# Altium PCB Main.PcbDoc (part 1 of 2)
Units mil, origin at the board's own origin, x right, y up, seen from the top; angles counter-clockwise.
Board outline 5000 x 2500 mil, 2 copper layers (Top Layer, Bottom Layer), stack 62.8 mil thick; 113 components, 93 nets, 434 pads, 302 vias.
Unrouted connection lines stored in the file: 1.
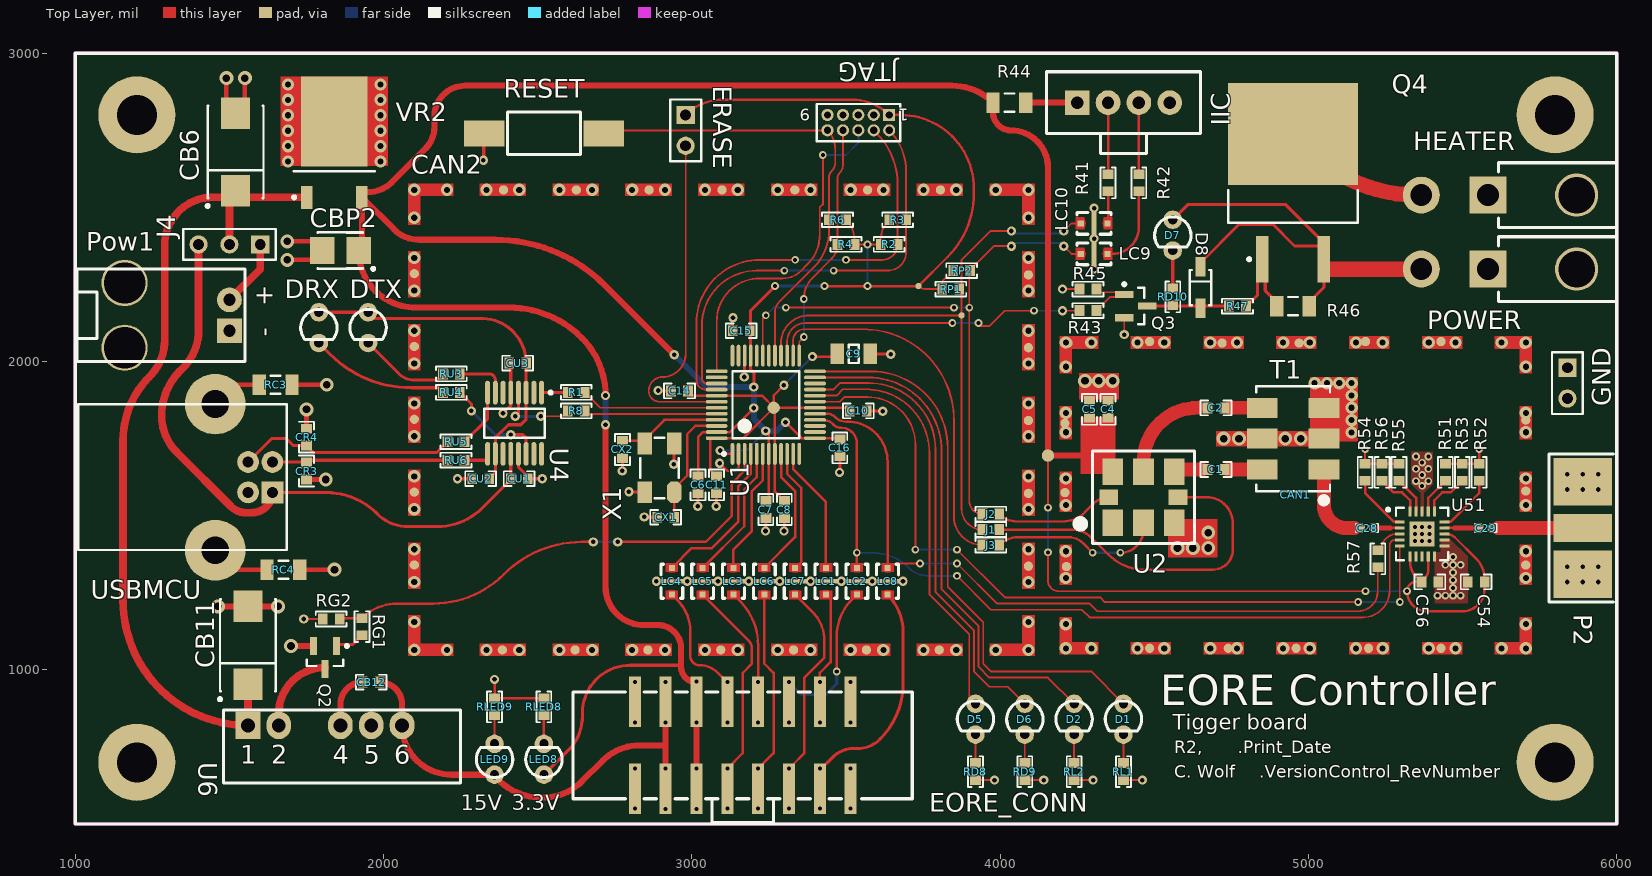
[diagram p0: Top Layer view]
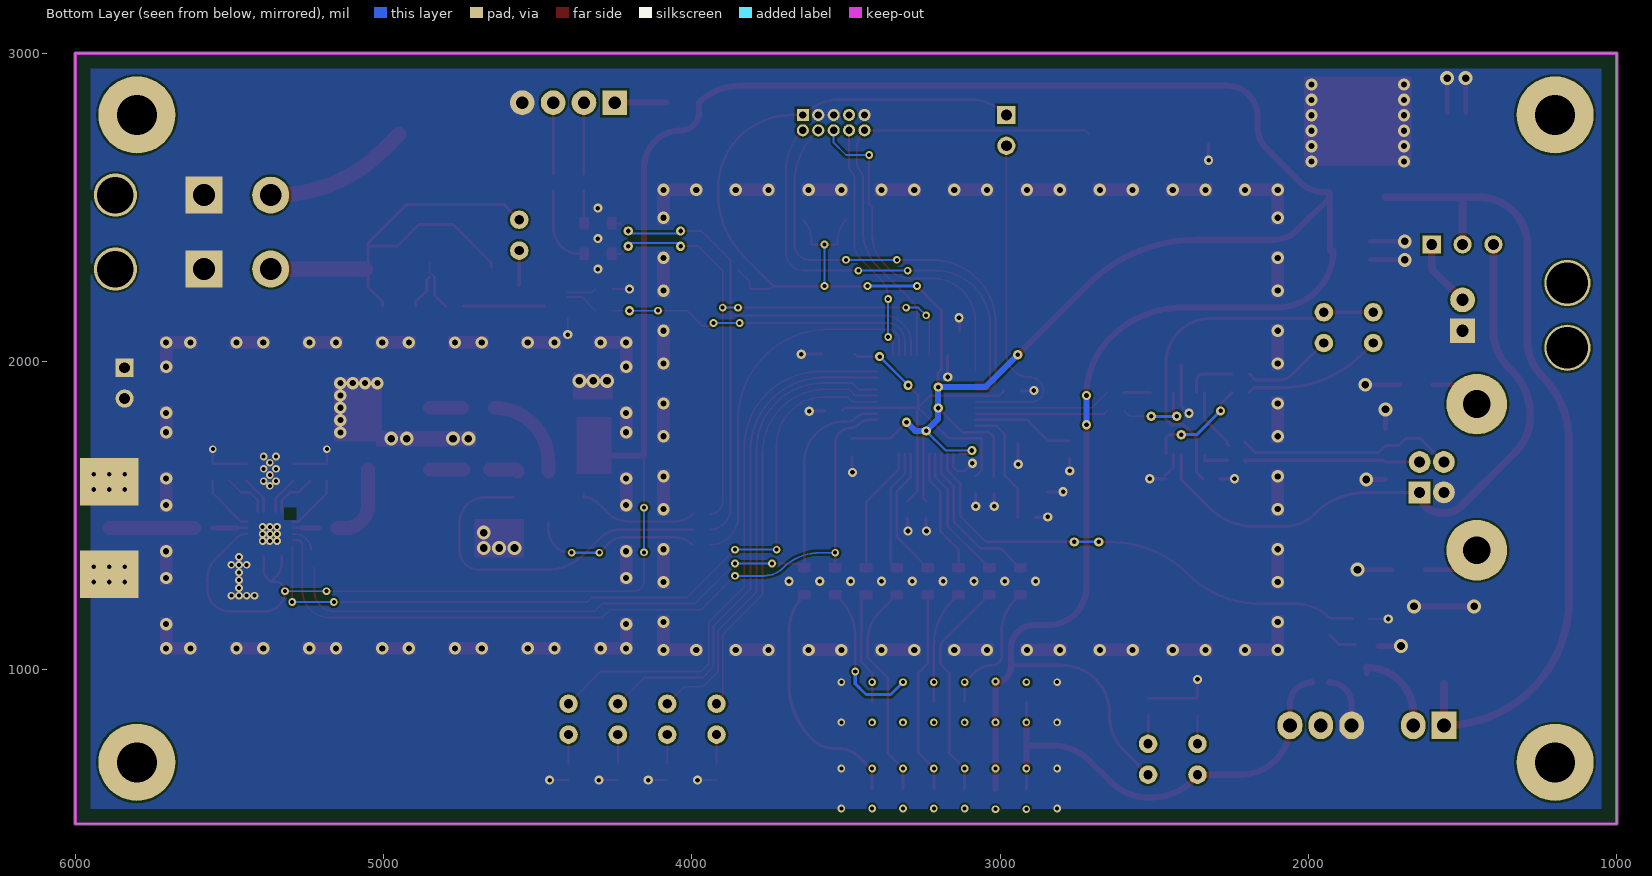
[diagram p1: Bottom Layer view, seen from below]

## Layer stack, top to bottom
Top Layer: signal copper 1.4
Dielectric: core 60, FR-4, Dk 4.8
Bottom Layer: signal copper 1.4

## Board outline
1000,500 6000,500 6000,3000 1000,3000

## Design rules (kind name [scope] priority, off if disabled: settings)
Clearance [All] p1: gap=7
DiffPairsRouting [All] p1: maxlimit=10 minlimit=10 mostfreqgap=10 maxuncoupledlength=500
FlightTimeFalling [All] p1: maximum=1.000n
FlightTimeRising [All] p1: maximum=1.000n
HoleSize [All] p1: absolutevalues=TRUE maxlimit=500 minlimit=1 maxpercent=80.000 minpercent=20.000
HoleSize Testpoint [All] p2: absolutevalues=TRUE maxlimit=100 minlimit=1 maxpercent=80.000 minpercent=20.000
HoleSize TestPointUsage [All] p3: absolutevalues=TRUE maxlimit=100 minlimit=1 maxpercent=80.000 minpercent=20.000
MinimumAnnularRing [All] p1: minimumring=5
MinimumSolderMaskSliver [All] p1 off: minsoldermaskwidth=10
MinimumSolderMaskSliver SilkscreenOverComponentPads [All] p2: minsoldermaskwidth=10
OvershootFalling [All] p1: maximum=330.0m
OvershootRising [All] p1: maximum=330.0m
ParallelSegment [All] p1 off: limit=10000 gap=10
PolygonConnect Heatsink [InNet('GND') vs InNet('GND')] p1: connectstyle=Direct reliefconductorwidth=10 reliefentries=4 polygonreliefangle="90 Angle" airgapwidth=10
PolygonConnect [All] p2: connectstyle=Relief reliefconductorwidth=10 reliefentries=4 polygonreliefangle="90 Angle" airgapwidth=10
RoomDefinition TEMP [InComponentClass('TEMP')] p1 off: confinementstyle=ConfineIn formatcopy=TRUE lockcomponents=FALSE outline 8025,2555 9495,2555 9495,3175 8025,3175
RoomDefinition NDPS [InComponentClass('NDPS')] p2 off: confinementstyle=ConfineIn formatcopy=TRUE lockcomponents=FALSE outline 6305,3125 6825,3125 6825,3580 6305,3580
RoomDefinition ATTEN3 [InComponentClass('ATTEN3')] p3 off: confinementstyle=ConfineIn formatcopy=TRUE lockcomponents=FALSE outline 6340,3745 7320,3745 7320,4075 6340,4075
RoomDefinition USB [InComponentClass('USB')] p4 off: confinementstyle=ConfineIn formatcopy=TRUE lockcomponents=FALSE outline 7580,2235 9580,2235 9580,3235 7580,3235
RoomDefinition Main [InComponentClass('Main')] p5 off: confinementstyle=ConfineIn formatcopy=TRUE lockcomponents=FALSE outline 7495,2125 9495,2125 9495,3125 7495,3125
RoutingVias [All] p1: holewidth=15 width=30 viastyle="Through Hole" minholewidth=10 minwidth=25 maxholewidth=250 maxwidth=500
SignalStimulus [All] p1: kind=2 level=0 starttime=10.00n stoptime=60.00n periodtime=100.00n
SilkToSilkClearance [All] p1 off: silktosilkclearance=10
SolderMaskExpansion [All] p1: expansion=4
SupplyNets [All] p1: voltage=3.300
UndershootFalling [All] p1: maximum=330.0m
UndershootRising [All] p1: maximum=330.0m
Width Width_General [All] p1: maxlimit=250 minlimit=6 preferedwidth=10
Width "Width Differential Pair" [(InDifferentialPairClass('All Differential Pairs'))] p2: maxlimit=31.8 minlimit=1.94 preferedwidth=22.52 toplayer_minwidth=15.8 bottomlayer_maxwidth=5.3 bottomlayer_prefwidth=3.35 impedancedriven=TRUE minimp=80.000000 maximp=100.000000 favimp=90.000000
24 further rules are at their usual default settings.

## Classes and differential pairs
component class TEMP: D7 D8 HEATER IIC LC9 LC10 POWER Q3 Q4 R41 R42 R43 R44 R45 R46 R47 RD10
component class Main: C1 C2 C4 C5 C28 C29 CAN1 CAN2 CB6 CBP2 EORE_CONN GND J1 J2 J3 LC1 LC2 LC3 LC4 LC5 LC6 LC7 LC8 LED8 P2 RLED8 RP1 RP2 T1 U2 VR2
component class USB: C6 C7 C8 C9 C10 C11 C14 C15 C16 CR3 CR4 CU1 CU2 CU3 CX1 CX2 D1 D2 D5 D6 DRX DTX ERASE J4 JTAG Pow1 R1 R2 R3 R4 R6 R8 RC3 RC4 RD8 RD9 RESET RL1 RL2 RU3 RU4 RU5 RU6 U1 U4 USBMCU X1
component class ATTEN3: C54 C56 R51 R52 R53 R54 R55 R56 R57 U51
component class NDPS: CB11 CB12 LED9 Q2 RG1 RG2 RLED9 U6
differential pair USB: +USB_P -USB_N

## Components (designator, comment, footprint, x,y, rotation, side; value= is the part's Value field where it differs from the comment)
C1 "SMT Cap" 0603C 4700,1650 r0 top
C2 "SMT Cap" 0603C 4700,1850 r0 top
C4 "SMT Cap" 0603C 4350,1845 r270 top
C5 "SMT Cap" 0603C 4290,1845 r270 top
C6 "Cap Semi" 0603C 3020,1600 r90 top
C7 "Cap Semi" 0603C 3240,1520 r90 top
C8 "Cap Semi" 0603C 3300,1520 r90 top
C9 "Cap Semi" 1206C 3525,2025 r180 top
C10 "Cap Semi" 0603C 3540,1840 r180 top
C11 "Cap Semi" 0603C 3080,1600 r90 top
C14 "Cap Semi" 0603C 2960,1905 r0 top
C15 "Cap Semi" 0603C 3160,2100 r0 top
C16 "Cap Semi" 0603C 3480,1720 r90 top
C28 "Cap" 0402C 5190,1460 r0 top
C29 "Cap" 0402C 5575,1460 r0 top
C54 "SMT Cap" 0603C 5544.02,1285.44 r0 top
C56 "SMT Cap" 0603C 5394.02,1285.44 r180 top
CAN1 "EMI Shield" BMI-S-205-F 5725,1050 r90 top
CAN2 "EMI Shield" BMI-S-230-F 2080,1045 r0 top locked
CB6 "Cap Pol3" V 1520,2680 r90 top
CB11 "Cap Pol3" V 1560,1080 r90 top
CB12 "Cap Semi" 0603C 1960,960 r0 top
CBP2 "100 uF" B 1860,2360 r180 top
CR3 "PGB1010603" 0603PG 1750,1645 r270 top
CR4 "PGB1010603" 0603PG 1750,1755 r90 top
CU1 "Cap Semi" 0603C 2440,1620 r180 top
CU2 "Cap Semi" 0603C 2315,1620 r0 top
CU3 "Cap Semi" 0603C 2435,1995 r0 top
CX1 "Cap Semi" 0603C 2915,1495 r0 top
CX2 "Cap Semi" 0603C 2775,1715 r90 top
D1 "LED0" "T1 LED" 4400,790 r0 top
D2 "LED0" "T1 LED" 4240,790 r0 top
D5 "LED0" "T1 LED" 3920,790 r0 top
D6 "LED0" "T1 LED" 4080,790 r0 top
D7 "LED0" "T1 LED" 4560,2360 r0 top
D8 "D Zener" SOD123/X.85 4650,2240 r270 top
DRX "LED0" "T1 LED" 1790,2060 r0 top
DTX "LED0" "T1 LED" 1950,2060 r0 top
EORE_CONN "Header 8X2" "SMT 16-pin rectangular header" 3165,755 r0 top
ERASE "Header 2" HDR1X2 2980,2800 r270 top
GND "Jumper" HDR1X2 5840,1980 r270 top
HEATER "Header 2" "Molex Mini-Fit Jr 5569 - 2 Pin, RA" 5870,2540 r90 top
IIC "Header 4" "AMPModu MTE 4 Pin Shrouded Header" 4550,2840 r180 top
J1 "Jumper" 0603R 3970,1455 r180 top
J2 "Jumper" 0603R 3970,1505 r180 top
J3 "Jumper" 0603R 3970,1405 r180 top
J4 "Jumper" HDR1X3 1600,2380 r180 top
JTAG "JTAG" MHDR2X5 3640,2800 r180 top
LC1 "MEM2012F" "MEM2012S LC Filter" 3435,1287.44 r90 top
LC2 "MEM2012F" "MEM2012S LC Filter" 3535,1287.44 r90 top
LC3 "MEM2012F" "MEM2012S LC Filter" 3135,1287.44 r270 top
LC4 "MEM2012F" "MEM2012S LC Filter" 2935,1287.44 r270 top
LC5 "MEM2012F" "MEM2012S LC Filter" 3035,1287.44 r90 top
LC6 "MEM2012F" "MEM2012S LC Filter" 3235,1287.44 r90 top
LC7 "MEM2012F" "MEM2012S LC Filter" 3335,1287.44 r270 top
LC8 "MEM2012F" "MEM2012S LC Filter" 3635,1287.44 r270 top
LC9 "MEM2012F" "MEM2012S LC Filter" 4304.76,2349.39 r0 top
LC10 "MEM2012F" "MEM2012S LC Filter" 4304.76,2448.39 r180 top
LED8 "LED0" "T1 LED" 2520,760 r180 top
LED9 "LED0" "T1 LED" 2360,760 r180 top
P2 "COAX-M" "SMA Jack - PCB Edge - MultiSize" 5990,1460 r180 top
Pow1 "Header 2" "AMPModu MTE 2 Pin Right Angle PCB-Locking Shrouded Header" 1500,2100 r90 top
POWER "Header 2" "Molex Mini-Fit Jr 5569 - 2 Pin, RA" 5870,2300 r90 top
Q2 "MOSFET-N" SOT23-3N 1810,1040 r270 top
Q3 "MOSFET-N" SOT23-3N 4440,2180 r0 top
Q4 "IRF4905STRLPBFCT-ND" TO254P1520-3_4N 4950,2580 r90 top
R1 "Res Semi" 0603R 2625,1900 r0 top
R2 "Res Semi" 0603R 3640,2380 r180 top
R3 "Res Semi" 0603R 3667.56,2460 r180 top
R4 "Res Semi" 0603R 3500,2380 r0 top
R6 "Res Semi" 0603R 3472.44,2460 r0 top
R8 "Res Semi" 0603R 2625,1840 r0 top
R41 "Res Semi" 0603R 4350,2580 r90 top
R42 "Res Semi" 0603R 4450,2580 r90 top
R43 "Res Semi" 0603R 4285,2165 r0 top
R44 "Res Semi" 1206R 4030,2840 r180 top
R45 "Res Semi" 0603R 4285,2235 r0 top
R46 "Res Semi" 1206R 4950,2180 r0 top
R47 "Res Semi Small" 0603R 4770,2180 r180 top
R51 "RES Semi" 0603R 5444,1640.77 r90 top
R52 "RES Semi" 0603R 5554,1640.77 r90 top
R53 "RES Semi" 0603R 5499,1640.77 r90 top
R54 "RES Semi" 0603R 5184,1640.77 r90 top
R55 "RES Semi" 0603R 5294,1640.77 r90 top
R56 "RES Semi" 0603R 5239,1640.77 r90 top
R57 "RES Semi" 0603R 5225,1360 r270 top
RC3 "Res Semi" 1206R 1650,1925 r180 top
RC4 "Res Semi" 1206R 1675,1325 r180 top
RD8 "Res Semi Small" 0603R 3920,670 r270 top
RD9 "Res Semi Small" 0603R 4080,670 r270 top
RD10 "Res Semi Small" 0603R 4560,2210 r270 top
RESET "SW-PB" TL3302BF180QG/TR 2520,2740 r180 top
RG1 "Res Semi Small" 0603R 1930,1140 r270 top
RG2 "Res Semi Small" 0603R 1830,1165 r0 top
RL1 "Res Semi Small" 0603R 4400,670 r270 top
RL2 "Res Semi Small" 0603R 4240,670 r270 top
RLED8 "Res Semi Small" 0603R 2520,880 r90 top
RLED9 "Res Semi Small" 0603R 2360,880 r90 top
RP1 "Res Semi" 0603R 3840,2235 r180 top
RP2 "Res Semi" 0603R 3875,2295 r180 top
RU3 "Res Semi Small" 0603R 2220,1960 r0 top
RU4 "Res Semi Small" 0603R 2220,1900 r0 top
RU5 "Res Semi Small" 0603R 2235,1740 r0 top
RU6 "Res Semi Small" 0603R 2235,1680 r0 top
T1 "ADT4-1WT" CD542 4950,1750 r90 top
U1 "ATSAM4N8A" TSQFP50P900X900-48N 3240,1860 r90 top
U2 "SI57x" SI57x 4465,1560 r0 top
U4 "FT230X" SOP635P600-16AN 2425,1800 r270 top
U6 "NMF DC-DC" SIL-6(A1) 1560,820 r0 top
U51 "DAT-31R5-SP" QFN50P400X400X90_HS-21N 5369,1440.77 r0 top
USBMCU "USB B Connector" "USB Connector (type B)" 1600,1625 r270 top
VR2 "LF33CDT" TO228P1000-3_4N 1840,2710 r90 top
X1 "CTX819CT-ND" "Abracon ABM3B Crystal" 2895,1655 r90 top

## Footprints (in the part's own frame and the unit in brackets; to place one, negate y for a bottom-side part, rotate by r counter-clockwise, add the part's x,y. Pads: shape width x height; smd on the part's side, far side on the other; paste and mask are expansions set on the pad)
0402C [mil]
  rect 25x20 smd: 1(-19.02,0) 2(19.02,0)
  silkscreen extent -36,-14 36,14, body extent -36,-14 36,14
0603C [mm] "0603 Size Capacitor"
  rect 0.8x0.9 smd: 1(-0.7,0) 2(0.7,0)
  silkscreen extent -1.27,-0.61 1.27,0.61, body extent -0.87,-0.48 0.87,0.48, height 1.3
0603PG [mm]
  rect 0.8x0.9 smd: 1(-0.7,0) 2(0.7,0)
  silkscreen extent -1.27,-0.61 1.27,0.61, body extent -0.87,-0.48 0.87,0.48, height 1.3
0603R [mm]
  rect 0.8x0.9 smd: 1(-0.7,0) 2(0.7,0)
  silkscreen extent -1.27,-0.61 1.27,0.61, body extent -0.87,-0.48 0.87,0.48, height 1.3
1206C [mm] "1206 Chip Capacitor"
  rect 1.1x1.7 smd: 1(-1.35,0) 2(1.35,0)
  silkscreen extent -0.4,-0.75 0.4,0.75, body extent -1.7,-0.9 1.7,0.9, height 1.3
1206R [mm] "1206 Chip Resistor"
  rect 1.1x1.7 smd: 1(-1.35,0) 2(1.35,0)
  silkscreen extent -0.4,-0.75 0.4,0.75, body extent -1.7,-0.9 1.7,0.9, height 1.3
"Abracon ABM3B Crystal" [mm] "Abracon ABM3B Quartz Crystal"
  oct 1.8x1.2 smd: 1(-2,-1.2)
  rect 1.8x1.2 smd: 2(2,-1.2) 3(2,1.2) 4(-2,1.2)
  silkscreen extent -2.5,-1.6 2.5,1.6, body extent -2.5,-1.6 2.5,1.6, height 2.54
"AMPModu MTE 2 Pin Right Angle PCB-Locking Shrouded Header" [mil] "AMPModu MTE 2 Pin Right Angle PCB-Locking Shrouded Header"
  round 150 hole 134: 0(-55,340) 0(155,340)
  rect 80x80 hole 40: 1(0,0)
  round 80 hole 40: 2(100,0)
  silkscreen extent -100,-50 200,495, body extent -100,-40 200,495, height 278
"AMPModu MTE 4 Pin Shrouded Header" [mil] "AMPModu MTE 4 Pin Shrouded Header"
  rect 80x80 hole 40: 1(300,0)
  round 80 hole 40: 2(200,0) 3(100,0) 4(0,0)
  silkscreen extent -100,-100 400,165, body extent -100,-100 400,160, height 540
B [mm] "Capacitor, SM Tantalum; Body 3.5 x 2.8 mm (LxW typ)"
  rect 2x2.2 smd: 1(-1.5,0) 2(1.5,0)
  silkscreen extent -2.83,-1.5 1.85,1.62
BMI-S-205-F [mil] "Laird BMI-S-205-F EMI Shield"
  round 30 smd: 1(20,1240) 1(20,765) 1(20,530) 1(20,295) 1(20,1510) 1(20,985) 1(20,25) 1(285,1510) 1(290,20) 1(525,1515) 1(530,20) 1(750,1515) 1(760,20) 1(1005,25) 1(1010,1005) 1(1010,1505) 1(1010,755) 1(1015,1240) 1(1015,295) 1(1015,540)
  Top Layer region: 226.38,0 226.38,39.37 356.3,39.37 356.3,0
  Top Layer region: 462.6,0 462.6,39.37 592.52,39.37 592.52,0
  Top Layer region: 698.82,0 698.82,39.37 805.12,39.37 805.12,0
  Top Layer region: 911.42,0 911.42,39.37 992.13,39.37 992.13,120.08 1031.5,120.08 1031.5,0
  Top Layer region: 992.13,226.38 1031.5,226.38 1031.5,356.3 992.13,356.3
  Top Layer region: 992.13,462.6 1031.5,462.6 1031.5,592.52 992.13,592.52
  Top Layer region: 992.13,698.82 1031.5,698.82 1031.5,828.74 992.13,828.74
  Top Layer region: 992.13,935.04 1031.5,935.04 1031.5,1064.96 992.13,1064.96
  Top Layer region: 992.13,1171.26 1031.5,1171.26 1031.5,1301.18 992.13,1301.18
  Top Layer region: 911.42,1492.13 911.42,1531.5 1031.5,1531.5 1031.5,1407.48 992.13,1407.48 992.13,1492.13
  Top Layer region: 698.82,1492.13 805.12,1492.13 805.12,1531.5 698.82,1531.5
  Top Layer region: 462.6,1492.13 592.52,1492.13 592.52,1531.5 462.6,1531.5
  Top Layer region: 226.38,1492.13 356.3,1492.13 356.3,1531.5 226.38,1531.5
  Top Layer region: 0,1407.48 39.37,1407.48 39.37,1492.13 120.08,1492.13 120.08,1531.5 0,1531.5
  Top Layer region: 0,1171.26 0,1301.18 39.37,1301.18 39.37,1171.26
  Top Layer region: 0,935.04 0,1064.96 39.37,1064.96 39.37,935.04
  Top Layer region: 0,698.82 0,828.74 39.37,828.74 39.37,698.82
  Top Layer region: 0,462.6 0,592.52 39.37,592.52 39.37,462.6
  Top Layer region: 0,226.38 0,356.3 39.37,356.3 39.37,226.38
  Top Layer region: 0,0 0,120.08 39.37,120.08 39.37,39.37 120.08,39.37 120.08,0
  body extent 0,0 1031,1531, height 236
BMI-S-230-F [mil] "Laird BMI-S-230-F EMI Shield"
  round 30 smd: 1(19.68,295.28) 1(19.68,531.5) 1(19.68,767.72) 1(19.68,1003.94) 1(19.68,1240.16) 1(20,25) 1(25,1511.5) 1(305.12,19.68) 1(309.06,1511.81) 1(541.34,19.68) 1(545.28,1511.81) 1(777.56,19.68) 1(781.5,1511.81) 1(1013.78,19.68) 1(1017.72,1511.81) 1(1250,19.68) 1(1253.94,1511.81) 1(1486.22,19.68) 1(1490.16,1511.81) 1(1722.44,19.68) 1(1726.38,1511.81) 1(2006.5,20) 1(2011.5,1506.5) 1(2011.81,291.34) 1(2011.81,527.56) 1(2011.81,763.78) 1(2011.81,1000) 1(2011.81,1236.22)
  Top Layer region: 0,218.5 39.37,218.5 39.37,348.43 0,348.43
  Top Layer region: 232.28,0 381.89,0 381.89,39.37 232.28,39.37
  Top Layer region: 468.5,0 468.5,39.37 618.11,39.37 618.11,0
  Top Layer region: 704.72,0 854.33,0 854.33,39.37 704.72,39.37
  Top Layer region: 940.95,0 940.95,39.37 1090.55,39.37 1090.55,0
  Top Layer region: 1177.17,0 1326.77,0 1326.77,39.37 1177.17,39.37
  Top Layer region: 1413.39,0 1413.39,39.37 1562.99,39.37 1562.99,0
  Top Layer region: 1649.61,0 1799.21,0 1799.21,39.37 1649.61,39.37
  Top Layer region: 1885.83,0 2031.5,0 2031.5,131.89 1992.13,131.89 1992.13,39.37 1885.83,39.37
  Top Layer region: 1992.13,218.5 2031.5,218.5 2031.5,368.11 1992.13,368.11
  Top Layer region: 1992.13,454.72 2031.5,454.72 2031.5,604.33 1992.13,604.33
  Top Layer region: 1992.13,690.95 2031.5,690.95 2031.5,840.55 1992.13,840.55
  Top Layer region: 1992.13,927.17 2031.5,927.17 2031.5,1076.77 1992.13,1076.77
  Top Layer region: 1992.13,1163.39 2031.5,1163.39 2031.5,1312.99 1992.13,1312.99
  Top Layer region: 1885.83,1492.13 1885.83,1531.5 2031.5,1531.5 2031.5,1399.61 1992.13,1399.61 1992.13,1492.13
  Top Layer region: 1649.61,1492.13 1799.21,1492.13 1799.21,1531.5 1649.61,1531.5
  Top Layer region: 1413.39,1492.13 1562.99,1492.13 1562.99,1531.5 1413.39,1531.5
  Top Layer region: 1177.17,1492.13 1326.77,1492.13 1326.77,1531.5 1177.17,1531.5
  Top Layer region: 940.95,1492.13 1090.55,1492.13 1090.55,1531.5 940.95,1531.5
  Top Layer region: 704.72,1492.13 704.72,1531.5 854.33,1531.5 854.33,1492.13
  Top Layer region: 468.5,1492.13 618.11,1492.13 618.11,1531.5 468.5,1531.5
  Top Layer region: 232.28,1492.13 381.89,1492.13 381.89,1531.5 232.28,1531.5
  Top Layer region: 0,1399.61 0,1531.5 145.67,1531.5 145.67,1492.13 39.37,1492.13 39.37,1399.61
  Top Layer region: 0,1163.39 0,1312.99 39.37,1312.99 39.37,1163.39
  Top Layer region: 0,927.17 0,1076.77 39.37,1076.77 39.37,927.17
  Top Layer region: 0,690.95 0,840.55 39.37,840.55 39.37,690.95
  Top Layer region: 0,454.72 0,604.33 39.37,604.33 39.37,454.72
  Top Layer region: 0,218.5 0,368.11 39.37,368.11 39.37,218.5
  Top Layer region: 0,0 0,131.89 39.37,131.89 39.37,39.37 145.67,39.37 145.67,0
  body extent 0,0 2031,1531, height 236
CD542 [mm] "Mini-Circuits CD542 Package"
  rect 1.65x2.54 smd paste-0.1: 1(-2.54,-2.54) 2(0,-2.54) 3(2.54,-2.54) 4(2.54,2.54) 5(0,2.54) 6(-2.54,2.54)
  silkscreen extent -5.33,-3.05 4.32,3.05, body extent -3.94,-2.79 3.94,2.79, height 3
HDR1X2 [mm] "Connector; Header; 2 Position"
  rect 1.5x1.5 hole 0.9: 1(0,0)
  round 1.5 hole 0.9: 2(2.54,0)
  silkscreen extent -1.27,-1.27 3.81,1.27, body extent -1.27,-1.27 3.81,1.27, height 6.35
HDR1X3 [mm] "Connector; Header; 3 Position"
  rect 1.5x1.5 hole 0.9: 1(0,0)
  round 1.5 hole 0.9: 2(2.54,0) 3(5.08,0)
  silkscreen extent -1.27,-1.27 6.35,1.27
"MEM2012S LC Filter" [mm] "MEM2012S TDK LC Filter"
  rect 0.5x0.5 smd: 1(-1.1,0) 3(1.1,0)
  rect 0.4x2 smd: 2(0,0)
  Top Layer region: 1.5,0.5 1.5,-0.5 0.8,-0.5 0.7,0 0.8,0.5
  Top Layer region: -1.5,-0.5 -1.5,0.5 -0.8,0.5 -0.7,0 -0.8,-0.5
  silkscreen extent -1.4,-0.9 1.4,0.9, body extent -1.4,-0.7 1.4,0.7, height 0.85
MHDR2X5 [mm] "Connector; Header; 5x2 Position"
  rect 1x1 hole 0.6: 1(0,0)
  round 1 hole 0.6: 2(0,1.27) 3(1.27,0) 4(1.27,1.27) 5(2.54,0) 6(2.54,1.27) 7(3.81,0) 8(3.81,1.27) 9(5.08,0) 10(5.08,1.27)
  silkscreen extent -0.9,-0.9 5.98,2.17
"Molex Mini-Fit Jr 5569 - 2 Pin, RA" [mil] "Molex Mini-Fit Jr 5569 - 2 Pin Right Angle ( 39-30-1021 )( WM1363-ND )"
  round 140 hole 118: 0(0,0)
  rect 120x120 hole 71: 1(0,287)
  round 120 hole 71: 2(0,504)
  silkscreen extent -105,-130 105,254, body extent -104,-260 124,525, height 449
QFN50P400X400X90_HS-21N [mm] "QFN, 20-Leads, Body 4.00x4.00mm, Pitch 0.50mm, Thermal Pad 2.06x2.06mm, IPC Medium Density"
  rect 0.81x0.25 smd: 1(-1.845,1) 2(-1.845,0.5) 3(-1.845,0) 4(-1.845,-0.5) 5(-1.845,-1) 11(1.845,-1) 12(1.845,-0.5) 13(1.845,0) 14(1.845,0.5) 15(1.845,1)
  rect 0.25x0.81 smd: 6(-1,-1.845) 7(-0.5,-1.845) 8(0,-1.845) 9(0.5,-1.845) 10(1,-1.845) 16(1,1.845) 17(0.5,1.845) 18(0,1.845) 19(-0.5,1.845) 20(-1,1.845)
  rect 2.06x2.06 smd: 21(0,0)
  silkscreen extent -2.93,-2.15 2.15,2.15, body extent -2,-2 2,2, height 0.9
SI57x [mm] "Silicon Labs Programmable Oscillator"
  rect 1.7x2.15 smd: 1(-2.54,-2.1) 2(0,-2.1) 3(2.54,-2.1) 4(2.54,2.1) 5(0,2.1) 6(-2.54,2.1)
  rect 1.545x1.3 smd: 7(-2.852,0) 8(2.852,0)
  silkscreen extent -5.34,-3.8 4.2,3.8, body extent -4.2,-3.8 4.2,3.8, height 1.8
SIL-6(A1) [mil] "SIL-6(A1) - Single In line Package, 6 leads, one absent"
  rect 80x90 hole 45: 1(0,0)
  oval 80x90 hole 45: 2(100,0) 4(300,0) 5(400,0) 6(500,0)
  silkscreen extent -79,-187 689,49, body extent -79,-187 689,49, height 386
"SMA Jack - PCB Edge - MultiSize" [mil] "SMA Jack - PCB Edge - MultiSize"
  rect 190x90 smd: 1(100,0)
  round 30 hole 15: 2(50,175) 2(50,125) 2(50,-125) 2(50,-175) 2(100,175) 2(100,125) 2(100,-125) 2(100,-175) 2(150,125) 2(150,175) 2(150,-175) 2(150,-125)
  rect 190x155 smd: 2(100,150) 2(100,-150)
  rect 190x155 smd far side: 2(100,150) 2(100,-150)
  silkscreen extent 0,-240 210,240, body extent -5,-245 215,245, height 180
"SMT 16-pin rectangular header" [mil]
  rect 39x164 smd: 1(-350,-141) 2(-350,141) 3(-250,-141) 4(-250,141) 5(-150,-141) 6(-150,141) 7(-50,-141) 8(-50,141) 9(50,-141) 10(50,141) 11(150,-141) 12(150,141) 13(250,-141) 14(250,141) 15(350,-141) 16(350,141)
  silkscreen extent -550,-250 550,173, body extent -550,-173 550,173, height 358
SOD123/X.85 [mm] "SOD-123; 2 Leads; Body 2.7 x 1.6 mm, (LxW)"
  rect 1.6x0.85 smd: 1(-1.7,0) 2(1.7,0)
  silkscreen extent -1.45,-0.9 1.45,0.9
SOP635P600-16AN [mm] "SOP, 16-Leads, Body 4.9x3.9mm, Pitch 0.635mm, IPC Medium Density"
  oval 1.95x0.4 smd: 1(-2.525,2.222) 2(-2.525,1.587) 3(-2.525,0.952) 4(-2.525,0.317) 5(-2.525,-0.318) 6(-2.525,-0.953) 7(-2.525,-1.588) 8(-2.525,-2.223) 9(2.525,-2.222) 10(2.525,-1.587) 11(2.525,-0.952) 12(2.525,-0.317) 13(2.525,0.318) 14(2.525,0.953) 15(2.525,1.588) 16(2.525,2.223)
  silkscreen extent -2.65,-2.5 1.2,3.1, body extent -1.99,-2.5 1.99,2.5, height 1.76
SOT23-3N [mm] "SOT23, 3-Leads, Body 2.9x1.3mm, Pitch 0.95mm, Lead Span 2.5mm, IPC Medium Density"
  rect 1.5x0.6 smd: 1(-0.95,0.95) 2(-0.95,-0.95) 3(0.95,0)
  silkscreen extent -1.07,-1.5 0.7,1.92, body extent -0.7,-1.5 0.7,1.5, height 1.1
"T1 LED" [mil]
  round 60 hole 30: 1(0,100) 2(0,0)
  silkscreen extent -59,12 59,109, body extent -59,12 59,109, height 197
TL3302BF180QG/TR [mm] "SMT Push-Button NO Tactile Switch"
  rect 3.35x2.16 smd: 1(-4.925,0) 2(4.925,0)
  silkscreen extent -3,-1.75 3,1.75, body extent -3,-1.75 3,1.75, height 5
TO228P1000-3_4N [mm] "D-PAK, 4-Leads, Body 6.2x6.5mm, Pitch 2.28mm, Lead Span 9.9mm, IPC Medium Density"
  rect 1.9x0.95 smd: 1(-4.5,2.28) 3(-4.5,-2.28)
  rect 7.4x5.5 smd: 4(1.75,0)
  silkscreen extent -4.62,-3.35 -2.35,3.43, body extent -2.25,-3.37 4.1,3.37, height 2.39
TO254P1520-3_4N [mm] "D2-PAK, 4-Leads, Body 9x10.2mm, Pitch 2.54mm, Lead Span 15.2mm, IPC Medium Density"
  rect 3.8x1.05 smd: 1(-6.3,2.54) 3(-6.3,-2.54)
  rect 8.4x10.7 smd: 4(4,0)
  silkscreen extent -6.42,-5.35 -0.6,5.35, body extent -3.3,-5.33 6.35,5.33, height 4.83
TSQFP50P900X900-48N [mm] "Thin QFP, 48-Leads, Body 7x7mm, Pitch 0.5mm, IPC Medium Density"
  oval 1.8x0.3 smd: 1(-4.05,2.75) 2(-4.05,2.25) 3(-4.05,1.75) 4(-4.05,1.25) 5(-4.05,0.75) 6(-4.05,0.25) 7(-4.05,-0.25) 8(-4.05,-0.75) 9(-4.05,-1.25) 10(-4.05,-1.75) 11(-4.05,-2.25) 12(-4.05,-2.75) 25(4.05,-2.75) 26(4.05,-2.25) 27(4.05,-1.75) 28(4.05,-1.25) 29(4.05,-0.75) 30(4.05,-0.25) 31(4.05,0.25) 32(4.05,0.75) 33(4.05,1.25) 34(4.05,1.75) 35(4.05,2.25) 36(4.05,2.75)
  oval 0.3x1.8 smd: 13(-2.75,-4.05) 14(-2.25,-4.05) 15(-1.75,-4.05) 16(-1.25,-4.05) 17(-0.75,-4.05) 18(-0.25,-4.05) 19(0.25,-4.05) 20(0.75,-4.05) 21(1.25,-4.05) 22(1.75,-4.05) 23(2.25,-4.05) 24(2.75,-4.05) 37(2.75,4.05) 38(2.25,4.05) 39(1.75,4.05) 40(1.25,4.05) 41(0.75,4.05) 42(0.25,4.05) 43(-0.25,4.05) 44(-0.75,4.05) 45(-1.25,4.05) 46(-1.75,4.05) 47(-2.25,4.05) 48(-2.75,4.05)
  silkscreen extent -4.17,-2.75 2.75,3.57, body extent -3.5,-3.5 3.5,3.5, height 1.6
"USB Connector (type B)" [mm] "USB-B right angle through hole connector (molex)"
  rect 1.8x1.8 hole 0.92: 1(1.25,1)
  round 1.8 hole 0.92: 2(-1.25,1) 3(-1.25,-1) 4(1.25,-1)
  round 5 hole 2.3: 5(-6.02,-3.71) 6(6.02,-3.71)
  silkscreen extent -6,-15 6,2.2, body extent -8.64,-15 8.64,2.2, height 11
V [mm] "Capacitor, SM Tantalum; Body 7.3 x 4.3 mm (LxW typ)"
  rect 2.6x2.4 smd: 1(-3.2,0) 2(3.2,0)
  silkscreen extent -4.57,-2.3 3.8,2.42, body extent -3.78,-2.16 3.52,2.14, height 4.15

## Part data
C1 C2 C4 C5 C54 C56: library part "Cap - SMT Small"
C6 C7 C8 C9 C10 C11 C14 C15 C16 CB12 CU1 CU2 CU3 CX1 CX2: "Capacitor (Semiconductor SIM Model)"
C28 C29: "Capacitor"
CAN1: library part "BMI-S-205-F RF/EMI Can", "Laird Technologies 2-part EMI can"
CAN2: library part "BMI-S-230-F-R RF/EMI Can", "Laird Technologies 2-part EMI can"
CB6 CB11: "KEMET T520 KO-CAP  Polymer SMT Tantalum"
CBP2: library part "100 uf SMT Panasonic Cap"
CR3 CR4: "PulseGuard® Lead-Free 0603 Surface Mount Polymeric ESD Suppressors"
D1 D2 D5 D6 D7 DRX DTX LED8 LED9: "T 1 3/4 LED"
D8: "Zener Diode"
EORE_CONN: "Header, 8-Pin, Dual row"
ERASE HEATER Pow1 POWER: "Header, 2-Pin"
GND J1 J2 J3: library part "Jumper - 2 Pin", "Jumper - 2-Pin"
IIC: "Header, 4-Pin"
J4: library part "Jumper - 3 Pin", "Jumper - 3-Pin"
JTAG: library part "ARM JTAG-10", "ARM 10-Pin JTAG Interface"
LC1 LC2 LC3 LC4 LC5 LC6 LC7 LC8 LC9 LC10: library part "MEM2012F - Signal Filter", "Signal Line 3-terminal Filters"
P2: "RF Coaxial PCB Connector, MMCX; Thru-Hole, Vertical Mount Plug,  50 Ohm Impedance"
Q2 Q3: "N-Channel MOSFET"
Q4: library part MOSFET-P, "P-Channel MOSFET"
R1 R2 R3 R4 R6 R8 R41 R42 R43 R44 R45 R46 R47 R51 R52 R53 R54 R55 R56 R57 RC3 RC4 RD8 RD9 RD10 RG1 RG2 RL1 RL2 RLED8 RLED9 RP1 RP2 RU3 RU4 RU5 RU6: "Semiconductor Resistor"
RESET: "Switch"
T1: "Surface Mount RF Transformer"
U1: "SAM4N ARM Cortex-M4 Microcontrollers"
U2: library part SI570, "10 MHZ TO 1.4 GHZ I2C PROGRAMMABLE XO/VCXO"
U4: "USB To Basic Serial Bridge IC"
U6: library part "Murata NMF DC-DC", "Murata NMF DC-DC - 1W, Single output"
U51: "31.5 dB, 0.5 dB Step 6 Bit, Serial Control Interface, Single Positive Supply Voltage"
USBMCU: library part "USB B connector - Through hole"
VR2: "Very low drop 500 ma voltage regulators"
X1: library part "SMT Crystal", "16 MHz Micro SMT Crystal"

## Free pads (board coordinates)
  round 40 smd paste-3.94: 0(3265.51,1850.16) 0(4155,1695)
  round 20 smd: 0(3735,2245) 0(3875,2150)
  round 250 hole 130: 4(1200,2800) 6(5800,2800) 8(1200,700) 9(5800,700)

## Via types
v1: diameter 40, hole 20, Top Layer to Bottom Layer, tented both sides, 124 vias
v2: diameter 25, hole 13, Top Layer to Bottom Layer, tented both sides, 87 vias
v3: diameter 30, hole 15, Top Layer to Bottom Layer, tented both sides, 60 vias
v4: diameter 45, hole 25, Top Layer to Bottom Layer, tented both sides, 22 vias
v5: diameter 25, hole 13, Top Layer to Bottom Layer, 9 vias

## Nets (pads, with @x,y where several pads share a name; then routed paths per layer and width w, separated by ;. In a path a pad name is that pad's centre, name@x,y a point inside that pad or via, vN(x,y) a via of type N, cw(c..) or ccw(c..) an arc to the next point about the centre after c; other vN are vias at no path point)
3V3: C4.2 C5.2 C6.2 C7.2 C15.2 C16.2 C54.2 C56.2 CBP2.1 EORE_CONN.5 EORE_CONN.6 ERASE.1 JTAG.1 LED8.1 pad.0@3735,2245 pad.0@4155,1695 R2.2 R3.2 R4.2 R6.2 R44.2 RP1.2 RP2.2 U1.1 U1.7 U1.13 U1.33 U1.47 U2.6 U51.6 U51.9 U51.13 VR2.3 | length 15037.8
  Top Layer w6: R6.2@3500,2460 cw(c3433.47,2393.47) 3527.56,2393.47 R4.2@3527.56,2380 v2(3570,2380) R2.2@3612.44,2380 3612.44,2393.47 cw(c3706.53,2393.47) R3.2@3640,2460 ; pad.0@3735,2245 ccw(c3759.14,2269.14) 3759.14,2235 RP1.2@3812.44,2235 3812.44,2260 RP2.2@3847.44,2295 ; v2(4155,1381.22) 4155,1290 ccw(c4190,1290) 4190,1255 v2(5185,1255) ; v2(4155,1526.22) pad.0@4155,1695
  Top Layer w7: 5571.57,1262.42 C54.2@5571.57,1285.44
  Top Layer w8: ERASE.1@2980,2800 cw(c3100.71,2679.29) 3100.71,2850 3519.29,2850 cw(c3519.29,2679.29) JTAG.1@3640,2800 3676.01,2800 cw(c3676.01,2561.01) 3845,2730 cw(c3676.01,2561.01) 3915,2561.01 3915,2545 cw(c3625.29,2545) 3830.15,2340.15 pad.0@3735,2245 v2(3570,2245) v2(3430,2245) ; C6.2@3020,1627.56 3020,1755 3036.42,1771.42 U1.47@3080.55,1771.42 3123.13,1771.42 v3(3201.11,1849.39) ; v3(3091.51,1711.51) 3102.46,1700.55 U1.1@3131.73,1700.55 ; C7.2@3240,1547.56 3249.84,1557.4 U1.7@3249.84,1700.55 3249.84,1765.3 v3(3240,1775.15) ; v3(3303.64,1803.43) 3355.34,1751.73 U1.13@3399.45,1751.73 3480,1751.73 C16.2@3480,1747.56 ; U51.6@5329.63,1368.13 5329.63,1350 ccw(c5396.58,1350) 5349.22,1302.68 ; 5349.24,1302.66 C56.2@5366.46,1285.44 ; C56.2@5375.51,1294.49 C56.2@5366.46,1285.44 ; C56.2@5375.53,1294.51 ccw(c5343.7,1326.3) 5388.69,1326.3 U51.9@5388.69,1368.13 ; U51.13@5441.64,1440.77 5448.45,1440.77 cw(c5448.45,1404) 5474.43,1430.03 ; 5474.46,1430 5544.8,1359.66 cw(c5480.12,1295) 5571.57,1295 C54.2@5571.57,1285.44 ; 5571.57,1262.42 cw(c5499.16,1262.42) 5499.16,1190 5385,1190 cw(c5385,1255) v2(5320,1255) cw(c5350.44,1255) 5350.44,1285.44 C56.2@5366.46,1285.44
  Top Layer w10: LED8.1@2520,660 2599.04,739.04 ccw(c2488.08,850) 2645,850 2645,860 cw(c2800,860) 2800,1015 2960,1015 cw(c2960,1010) 2965,1010 ; v3(3201.11,1917.18) 3201.11,1963.89 3190.79,1974.21 U1.33@3190.79,2019.45 3190.79,2165.79 v2(3270,2245)
  Top Layer w20: CBP2.1@1919.06,2360 ccw(c2104.06,2360) 2057.74,2180.89 ccw(c2104.06,2360) 2104.06,2175 2407.51,2175 cw(c2407.51,1843.08) 2642.15,2077.85 cw(c2407.51,1843.08) 2642.22,2077.78 cw(c2454.44,1890) v3(2720,1890) ; CBP2.1@1929.76,2360 VR2.3@1929.76,2515.24 ; VR2.3@1929.76,2544.76 VR2.3@1929.76,2532.83 ; v3(2720,1795) 2720,1270 ccw(c2845,1270) 2845,1145 2890,1145 cw(c2890,1070) 2965,1070 2965,1010 ccw(c3015,1010) 3015,960 EORE_CONN.6@3015,896 v2(3015,830) v2(3015,680) EORE_CONN.5@3015,614 ; v3(2942.5,2022.5) 2716.45,2248.55 ccw(c2362.89,1895) 2362.89,2395 2115,2395 cw(c2115,2509.44) 2034.08,2428.52 VR2.3@1933,2529.6 ; 4280,1695 pad.0@4155,1695 4155,2630 ccw(c4035,2630) 4035,2750 cw(c4035,2808.15) 3976.85,2808.15 R44.2@3976.85,2840 ccw(c3844.07,2707.22) 3844.07,2895 2265,2895 ccw(c2265,2795) 2205,2875 ccw(c2265,2795) 2185,2855 ccw(c2265,2795) 2165,2795 2165,2761.42 cw(c2065,2761.42) 2135.71,2690.71 2026.82,2581.82 cw(c1950,2658.64) 1950,2550 1933,2550 VR2.3@1933,2529.6 ; VR2.3@1929.76,2532.83 ccw(c1972.25,2532.83) 1933,2516.58 VR2.3@1933,2529.6 ; VR2.3@1929.76,2532.83 VR2.3@1933,2529.6
  Bottom Layer w6: v2(3570,2245) v2(3570,2380) ; v2(4155,1381.22) v2(4155,1526.22) ; v2(5185,1255) v2(5320,1255)
  Bottom Layer w8: v3(3091.51,1711.51) 3176.36,1711.51 v3(3240,1775.15) ; JTAG.1@3640,2800 JTAG.1@3651.22,2800
  Bottom Layer w10: v2(3270,2245) v2(3430,2245)
  Bottom Layer w20: v3(2720,1795) v3(2720,1890) ; v3(2942.5,2022.5) 3047.82,1917.18 v3(3201.11,1917.18) v3(3201.11,1849.39) 3201.11,1814.04 v3(3240,1775.15) 3275.36,1775.15 v3(3303.64,1803.43)
  other v2: 3015,548 3015,962
5V0: CB6.1 CB11.1 J4.2 U6.1 VR2.1 | length 2660.7
  Top Layer w25: J4.2@1500,2380 CB6.1@1500,2532.83 ; CB11.1@1560,954.02 U6.1@1560,820 cw(c1560,1225) 1155,1225 1155,1744.79 cw(c1445.21,1744.79) 1240,1950 ccw(c1119.29,2070.71) 1290,2070.71 1290,2377.83 cw(c1445,2377.83) 1298.52,2428.52 cw(c1445,2377.83) 1394.31,2524.31 cw(c1445,2377.83) 1445,2532.83 CB6.1@1500,2532.83 ; VR2.1@1750.24,2532.83 CB6.1@1500,2532.83
CLOCK: LC2.3 U1.16 U51.4 | length 2628.9
  Top Layer w6: v2@3850,1305 v2(3860,1305) 3970,1195 4265,1195 4290,1170 5175,1170 ccw(c5175,1259.02) 5264.02,1259.02 5264.02,1405 cw(c5280.1,1405) 5265.66,1412.09 cw(c5280.1,1405) 5273.02,1419.44 cw(c5280.1,1405) 5280.1,1421.09 U51.4@5296.36,1421.09
  Top Layer w8: U1.16@3399.45,1810.79 3425.98,1810.79 cw(c3425.98,1766.77) 3457.08,1797.92 3459.39,1795.61 ccw(c3485,1821.21) 3485,1785 cw(c3485,1735) 3535,1735 LC2.3@3535,1330.75
  Bottom Layer w6: v2(3535,1380) 3584.29,1380 cw(c3584.29,1209.29) 3705,1330 ccw(c3765.36,1390.36) 3765.36,1305 v2(3860,1305)
CS_1: LC4.1 U1.4 | length 514.3
  Top Layer w8: LC4.1@2935,1330.75 2999.25,1395 3065,1395 3150,1480 3150,1595 3190.79,1635.79 U1.4@3190.79,1700.55
CS_2: LC5.3 U1.5 | length 442.5
  Top Layer w8: LC5.3@3035,1330.75 3170,1465.75 3170,1585 3210.47,1625.47 U1.5@3210.47,1700.55
CS_3: LC3.1 U1.6 | length 409.2
  Top Layer w8: LC3.1@3135,1330.75 3135,1390 3195,1450 3195,1580 3230.16,1615.16 U1.6@3230.16,1700.55
CS_4: LC6.3 U1.9 | length 437
  Top Layer w8: LC6.3@3230.16,1335.59 LC6.3@3235,1330.75 3335,1430.75 3335,1580 3289.21,1625.79 U1.9@3289.21,1700.55